# Altium PCB MOSFET.PcbDoc
Units mm, origin at the board's own origin, x right, y up, seen from the top; angles counter-clockwise.
Board outline 100 x 110 mm, 2 copper layers (Top Layer, Bottom Layer); 178 components, 63 nets, 636 pads, 0 vias.
Unrouted connection lines stored in the file: 541.
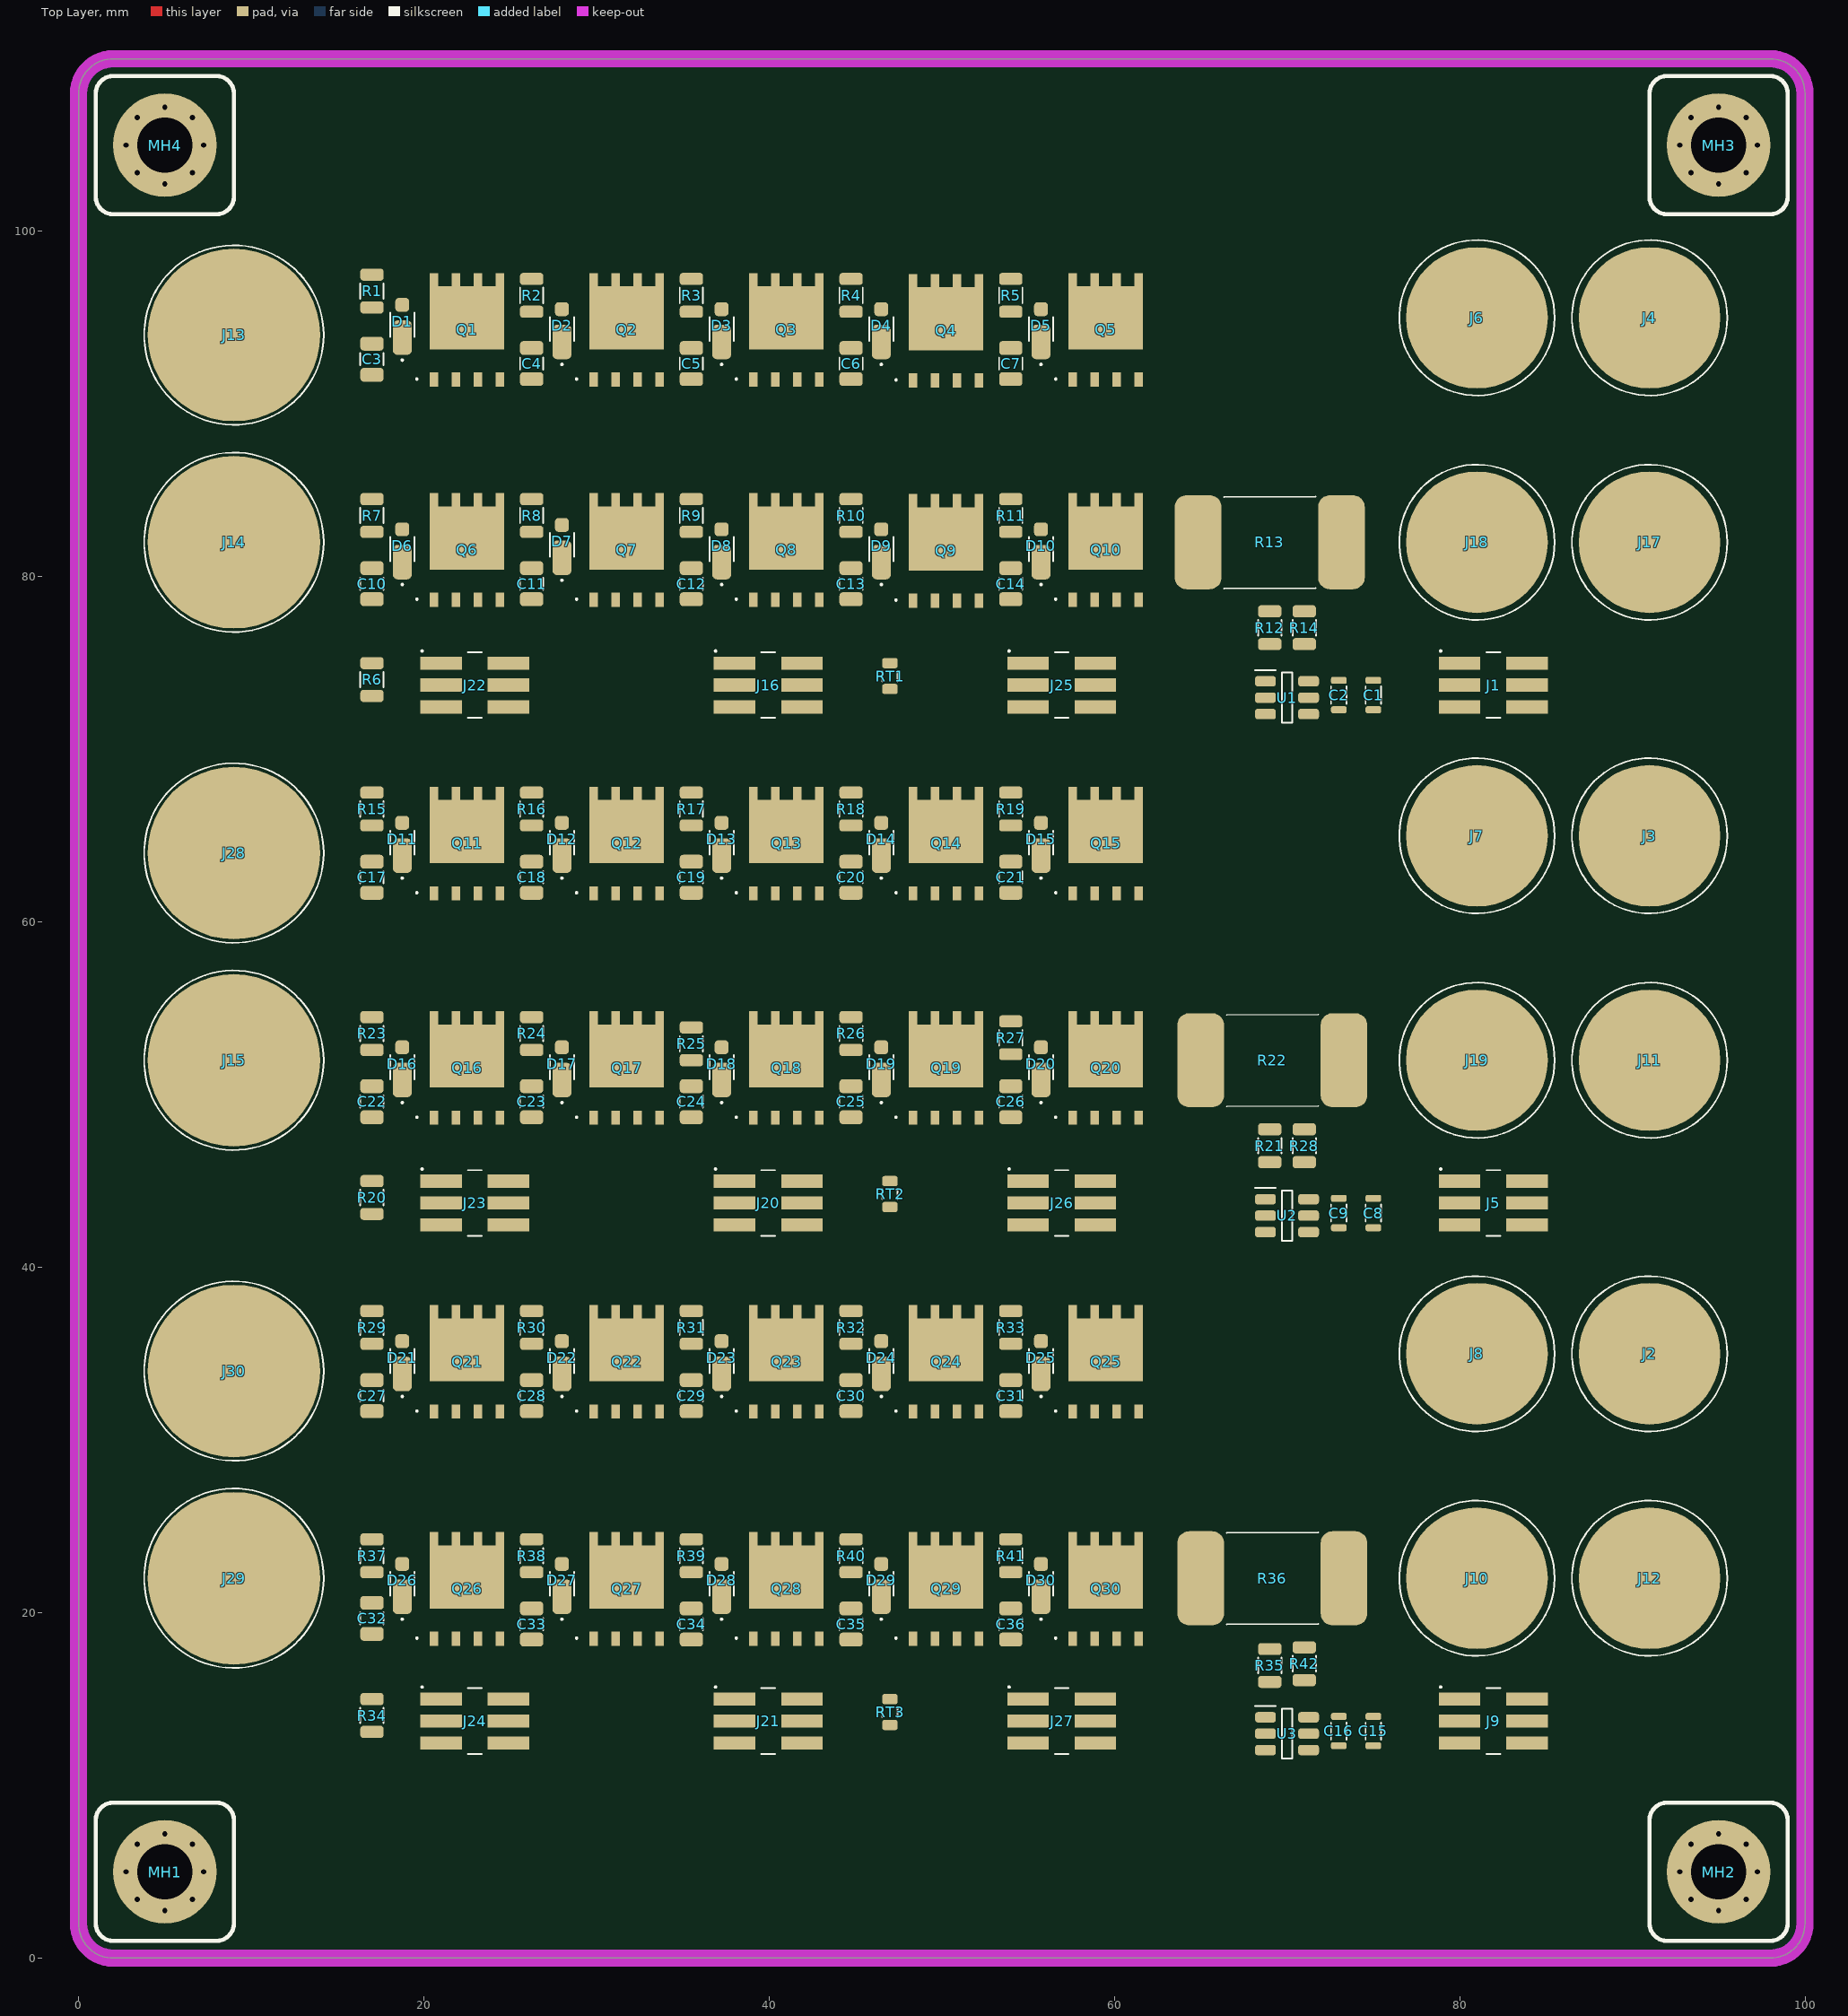
[diagram p0: Top Layer view]
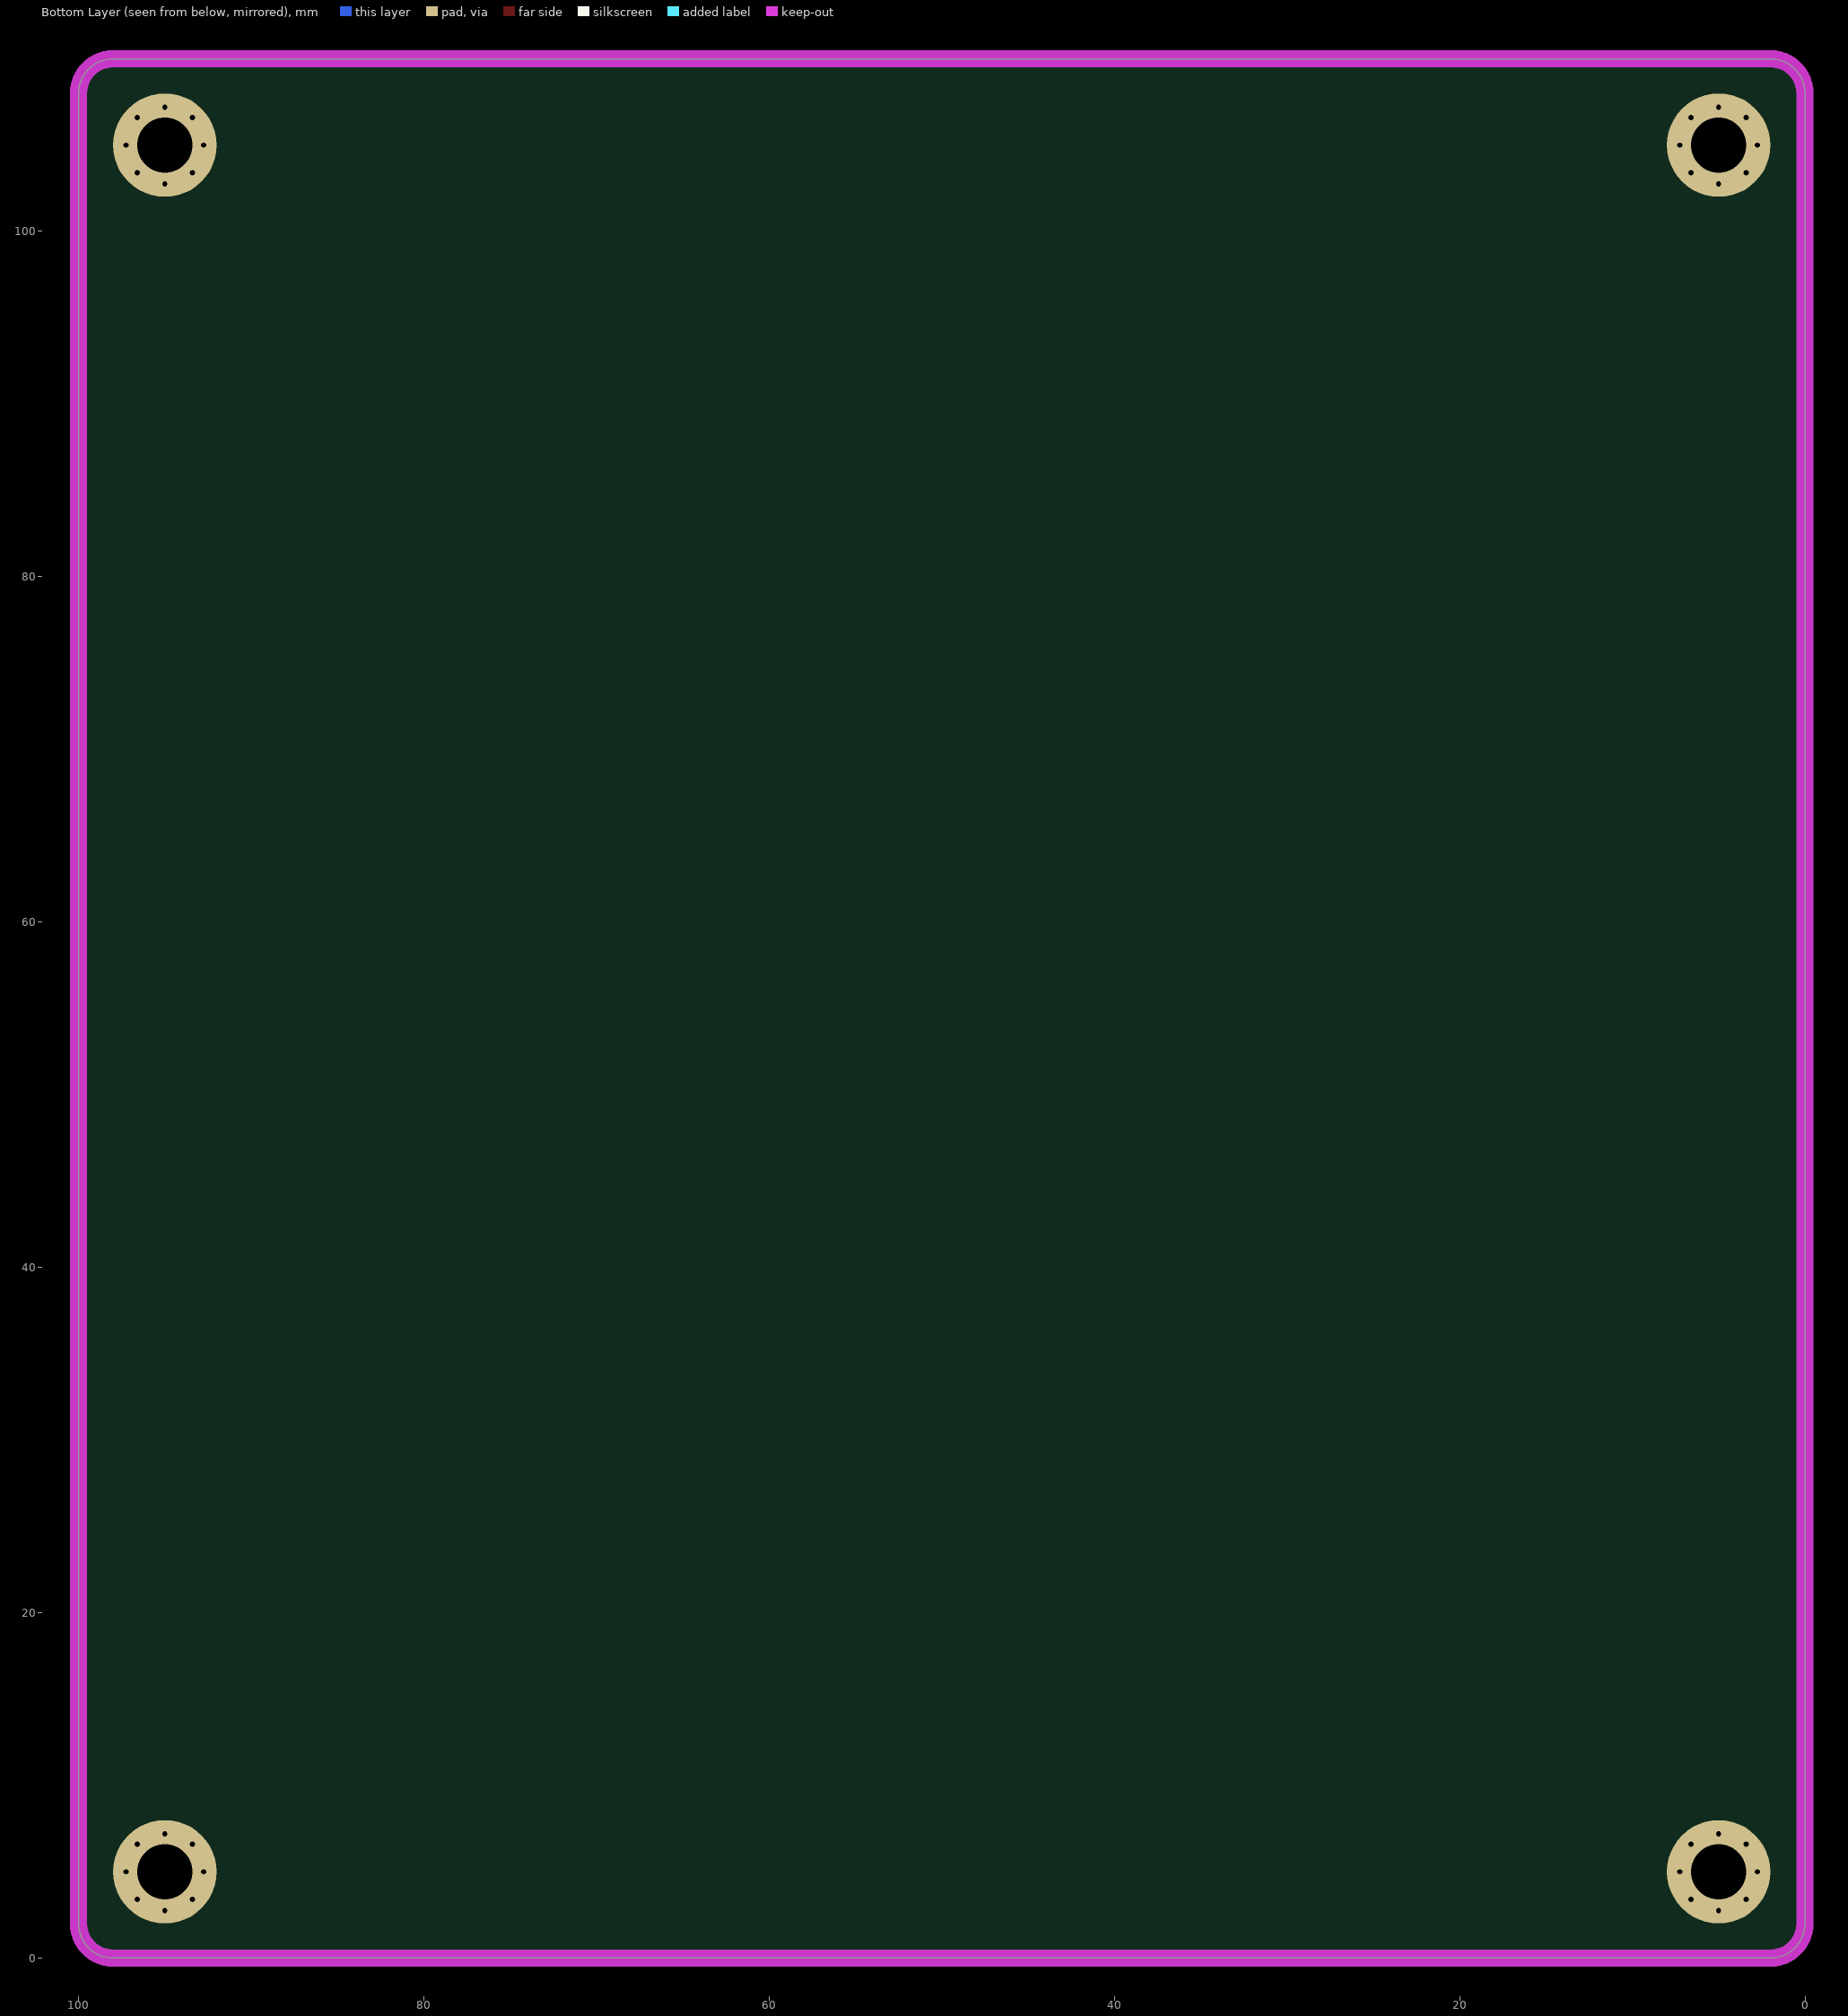
[diagram p1: Bottom Layer view, seen from below]

## Layer stack, top to bottom
Top Solder: solder mask 0.0102, Solder Resist, Dk 3.5
Top Layer: signal copper 0.0356
Dielectric 1: dielectric 0.32, FR-4, Dk 4.8
Bottom Layer: signal copper 0.0356
Bottom Solder: solder mask 0.0102, Solder Resist, Dk 3.5

## Board outline
0,2 0,108 cw(c2,108) 2,110 98,110 cw(c98,108) 100,108 100,2 cw(c98,2) 98,0 2,0 cw(c2,2)

## Design rules (kind name [scope] priority, off if disabled: settings)
Clearance [All] p1: gap=0.254 ignorepadtopadclearanceinfootprint=FALSE
DiffPairsRouting [All] p1: maxlimit=0.254 minlimit=0.254 mostfreqgap=0.254 toplayer_minwidth=0.381 toplayer_maxwidth=0.381 toplayer_prefwidth=0.381 bottomlayer_minwidth=0.381 bottomlayer_maxwidth=0.381 bottomlayer_prefwidth=0.381 maxuncoupledlength=12.7
PolygonConnect [All] p1: connectstyle=Relief reliefconductorwidth=0.254 reliefentries=4 polygonreliefangle="90 Angle" airgapwidth=0.254
RoutingVias [All] p1: holewidth=0.711 width=1.27 viastyle="Through Hole" minholewidth=0.711 minwidth=1.27 maxholewidth=0.711 maxwidth=1.27
SolderMaskExpansion [All] p1: expansion=0.102 istentingtop=FALSE
SupplyNets "Schematic Supply Nets_2" [InNet('+3V3')] p1: voltage=0.000
SupplyNets "Schematic Supply Nets_1" [InNet('GND')] p2: voltage=0.000
SupplyNets "Schematic Supply Nets" [InNet('VIN')] p3: voltage=0.000
Width [All] p1: maxlimit=0.254 minlimit=0.254 preferedwidth=0.254
29 further rules are at their usual default settings.

## Classes and differential pairs
differential pair SHUNT_C: +SHUNT_C_P -SHUNT_C_N
differential pair SHUNT_B: +SHUNT_B_P -SHUNT_B_N
differential pair SHUNT_A: +SHUNT_A_P -SHUNT_A_N

## Components (designator, comment, footprint, x,y, rotation, side; value= is the part's Value field where it differs from the comment)
C1 "0603" C_0603 75,74 r270 top value=1u
C2 "0603" C_0603 73,74 r270 top value=0.1u
C3 "0805" C_0805 17,93.5 r270 top value=Value
C4 "0805" C_0805 26.25,93.25 r270 top value=Value
C5 "0805" C_0805 35.5,93.25 r270 top value=Value
C6 "0805" C_0805 44.75,93.25 r270 top value=Value
C7 "0805" C_0805 54,93.25 r270 top value=Value
C8 "0603" C_0603 75,44 r270 top value=1u
C9 "0603" C_0603 73,44 r270 top value=0.1u
C10 "0805" C_0805 17,80.5 r270 top value=Value
C11 "0805" C_0805 26.25,80.5 r270 top value=Value
C12 "0805" C_0805 35.5,80.5 r270 top value=Value
C13 "0805" C_0805 44.75,80.5 r270 top value=Value
C14 "0805" C_0805 54,80.5 r270 top value=Value
C15 "0603" C_0603 75,14 r270 top value=1u
C16 "0603" C_0603 73,14 r270 top value=0.1u
C17 "0805" C_0805 17,63.5 r270 top value=Value
C18 "0805" C_0805 26.25,63.5 r270 top value=Value
C19 "0805" C_0805 35.5,63.5 r270 top value=Value
C20 "0805" C_0805 44.75,63.5 r270 top value=Value
C21 "0805" C_0805 54,63.5 r270 top value=Value
C22 "0805" C_0805 17,50.5 r270 top value=Value
C23 "0805" C_0805 26.25,50.5 r270 top value=Value
C24 "0805" C_0805 35.5,50.5 r270 top value=Value
C25 "0805" C_0805 44.75,48.7 r90 top value=Value
C26 "0805" C_0805 54,48.7 r90 top value=Value
C27 "0805" C_0805 17,33.477 r270 top value=Value
C28 "0805" C_0805 26.25,33.477 r270 top value=Value
C29 "0805" C_0805 35.5,33.477 r270 top value=Value
C30 "0805" C_0805 44.75,33.477 r270 top value=Value
C31 "0805" C_0805 54,33.477 r270 top value=Value
C32 "0805" C_0805 17,20.577 r270 top value=Value
C33 "0805" C_0805 26.25,20.25 r270 top value=Value
C34 "0805" C_0805 35.5,20.25 r270 top value=Value
C35 "0805" C_0805 44.75,20.25 r270 top value=Value
C36 "0805" C_0805 54,20.25 r270 top value=Value
D1 "V1PM15-M3_H" DO-219AD-2 18.75,93.85 r90 top
D2 "V1PM15-M3_H" DO-219AD-2 28,93.6 r90 top
D3 "V1PM15-M3_H" DO-219AD-2 37.25,93.6 r90 top
D4 "V1PM15-M3_H" DO-219AD-2 46.5,93.6 r90 top
D5 "V1PM15-M3_H" DO-219AD-2 55.75,93.6 r90 top
D6 "V1PM15-M3_H" DO-219AD-2 18.75,80.85 r90 top
D7 "V1PM15-M3_H" DO-219AD-2 28,81.1 r90 top
D8 "V1PM15-M3_H" DO-219AD-2 37.25,80.85 r90 top
D9 "V1PM15-M3_H" DO-219AD-2 46.5,80.85 r90 top
D10 "V1PM15-M3_H" DO-219AD-2 55.75,80.85 r90 top
D11 "V1PM15-M3_H" DO-219AD-2 18.75,63.85 r90 top
D12 "V1PM15-M3_H" DO-219AD-2 28,63.85 r90 top
D13 "V1PM15-M3_H" DO-219AD-2 37.25,63.85 r90 top
D14 "V1PM15-M3_H" DO-219AD-2 46.5,63.85 r90 top
D15 "V1PM15-M3_H" DO-219AD-2 55.75,63.85 r90 top
D16 "V1PM15-M3_H" DO-219AD-2 18.75,50.85 r90 top
D17 "V1PM15-M3_H" DO-219AD-2 28,50.85 r90 top
D18 "V1PM15-M3_H" DO-219AD-2 37.25,50.85 r90 top
D19 "V1PM15-M3_H" DO-219AD-2 46.5,50.85 r90 top
D20 "V1PM15-M3_H" DO-219AD-2 55.75,50.85 r90 top
D21 "V1PM15-M3_H" DO-219AD-2 18.75,33.827 r90 top
D22 "V1PM15-M3_H" DO-219AD-2 28,33.827 r90 top
D23 "V1PM15-M3_H" DO-219AD-2 37.25,33.827 r90 top
D24 "V1PM15-M3_H" DO-219AD-2 46.5,33.827 r90 top
D25 "V1PM15-M3_H" DO-219AD-2 55.75,33.827 r90 top
D26 "V1PM15-M3_H" DO-219AD-2 18.75,20.927 r90 top
D27 "V1PM15-M3_H" DO-219AD-2 28,20.927 r90 top
D28 "V1PM15-M3_H" DO-219AD-2 37.25,20.927 r90 top
D29 "V1PM15-M3_H" DO-219AD-2 46.5,20.927 r90 top
D30 "V1PM15-M3_H" DO-219AD-2 55.75,20.927 r90 top
J1 "HEADER" HEADER_MALE_2X3_1.27MM 80,75 r0 top
J2 "7466103" 7466203 91,35 r0 top
J3 "7466103" 7466203 91,65 r0 top
J4 "7466103" 7466203 91,95 r0 top
J5 "HEADER" HEADER_MALE_2X3_1.27MM 80,45 r0 top
J6 "7466103" 7466203 81,95 r0 top
J7 "7466103" 7466203 81,65 r0 top
J8 "7466103" 7466203 81,35 r0 top
J9 "HEADER" HEADER_MALE_2X3_1.27MM 80,15 r0 top
J10 "7466103" 7466203 81,22 r0 top
J11 "7466103" 7466203 91,52 r0 top
J12 "7466103" 7466203 91,22 r0 top
J13 "7466205R" 7466205R 9,94 r0 top
J14 "7466205R" 7466205R 9,82 r0 top
J15 "7466205R" 7466205R 9,52 r0 top
J16 "HEADER" HEADER_MALE_2X3_1.27MM 38,75 r0 top
J17 "7466103" 7466203 91,82 r0 top
J18 "7466103" 7466203 81,82 r0 top
J19 "7466103" 7466203 81,52 r0 top
J20 "HEADER" HEADER_MALE_2X3_1.27MM 38,45 r0 top
J21 "HEADER" HEADER_MALE_2X3_1.27MM 38,15 r0 top
J22 "HEADER" HEADER_MALE_2X3_1.27MM 21,75 r0 top
J23 "HEADER" HEADER_MALE_2X3_1.27MM 21,45 r0 top
J24 "HEADER" HEADER_MALE_2X3_1.27MM 21,15 r0 top
J25 "HEADER" HEADER_MALE_2X3_1.27MM 55,75 r0 top
J26 "HEADER" HEADER_MALE_2X3_1.27MM 55,45 r0 top
J27 "HEADER" HEADER_MALE_2X3_1.27MM 55,15 r0 top
J28 "7466205R" 7466205R 9,64 r0 top
J29 "7466205R" 7466205R 9,22 r0 top
J30 "7466205R" 7466205R 9,34 r0 top
MH1 "M3" MOUNTING_HOLE_M3 5,5 r0 top
MH2 "M3" MOUNTING_HOLE_M3 95,5 r0 top
MH3 "M3" MOUNTING_HOLE_M3 95,105 r0 top
MH4 "M3" MOUNTING_HOLE_M3 5,105 r0 top
Q1 "ISC073N12LM6ATMA1" TDSON-8 22.5,94.302 r0 top
Q2 "ISC073N12LM6ATMA1" TDSON-8 31.75,94.302 r0 top
Q3 "ISC073N12LM6ATMA1" TDSON-8 41,94.302 r0 top
Q4 "ISC073N12LM6ATMA1" TDSON-8 50.25,94.25 r0 top
Q5 "ISC073N12LM6ATMA1" TDSON-8 59.5,94.302 r0 top
Q6 "ISC073N12LM6ATMA1" TDSON-8 22.5,81.552 r0 top
Q7 "ISC073N12LM6ATMA1" TDSON-8 31.75,81.552 r0 top
Q8 "ISC073N12LM6ATMA1" TDSON-8 41,81.552 r0 top
Q9 "ISC073N12LM6ATMA1" TDSON-8 50.25,81.5 r0 top
Q10 "ISC073N12LM6ATMA1" TDSON-8 59.5,81.552 r0 top
Q11 "ISC073N12LM6ATMA1" TDSON-8 22.5,64.552 r0 top
Q12 "ISC073N12LM6ATMA1" TDSON-8 31.75,64.552 r0 top
Q13 "ISC073N12LM6ATMA1" TDSON-8 41,64.552 r0 top
Q14 "ISC073N12LM6ATMA1" TDSON-8 50.25,64.552 r0 top
Q15 "ISC073N12LM6ATMA1" TDSON-8 59.5,64.552 r0 top
Q16 "ISC073N12LM6ATMA1" TDSON-8 22.5,51.552 r0 top
Q17 "ISC073N12LM6ATMA1" TDSON-8 31.75,51.552 r0 top
Q18 "ISC073N12LM6ATMA1" TDSON-8 41,51.552 r0 top
Q19 "ISC073N12LM6ATMA1" TDSON-8 50.25,51.552 r0 top
Q20 "ISC073N12LM6ATMA1" TDSON-8 59.5,51.552 r0 top
Q21 "ISC073N12LM6ATMA1" TDSON-8 22.5,34.529 r0 top
Q22 "ISC073N12LM6ATMA1" TDSON-8 31.75,34.529 r0 top
Q23 "ISC073N12LM6ATMA1" TDSON-8 41,34.529 r0 top
Q24 "ISC073N12LM6ATMA1" TDSON-8 50.25,34.529 r0 top
Q25 "ISC073N12LM6ATMA1" TDSON-8 59.5,34.529 r0 top
Q26 "ISC073N12LM6ATMA1" TDSON-8 22.5,21.379 r0 top
Q27 "ISC073N12LM6ATMA1" TDSON-8 31.75,21.379 r0 top
Q28 "ISC073N12LM6ATMA1" TDSON-8 41,21.379 r0 top
Q29 "ISC073N12LM6ATMA1" TDSON-8 50.25,21.379 r0 top
Q30 "ISC073N12LM6ATMA1" TDSON-8 59.5,21.379 r0 top
R1 "0805" R_0805 17,97.5 r270 top value=Value
R2 "0805" R_0805 26.25,97.25 r270 top value=Value
R3 "0805" R_0805 35.5,97.25 r270 top value=Value
R4 "0805" R_0805 44.75,97.25 r270 top value=Value
R5 "0805" R_0805 54,97.25 r270 top value=Value
R6 "0805" R_0805 17,73.1 r90 top value=0R
R7 "0805" R_0805 17,84.5 r270 top value=Value
R8 "0805" R_0805 26.25,84.5 r270 top value=Value
R9 "0805" R_0805 35.5,84.5 r270 top value=Value
R10 "0805" R_0805 44.75,82.6 r90 top value=Value
R11 "0805" R_0805 54,84.5 r270 top value=Value
R12 "0805" R_0805 69,76.1 r90 top value=0R
R13 "WSLP3921L1000FEA" R_3921 69,82 r180 top value=100u
R14 "0805" R_0805 71,76.1 r90 top value=0R
R15 "0805" R_0805 17,67.5 r270 top value=Value
R16 "0805" R_0805 26.25,67.5 r270 top value=Value
R17 "0805" R_0805 35.5,67.5 r270 top value=Value
R18 "0805" R_0805 44.75,67.5 r270 top value=Value
R19 "0805" R_0805 54,67.5 r270 top value=Value
R20 "0805" R_0805 17,43.1 r90 top value=0R
R21 "0805" R_0805 69,46.1 r90 top value=0R
R22 "WSLP3921L1000FEA" R_3921 69.15,52 r180 top value=100u
R23 "0805" R_0805 17,54.5 r270 top value=Value
R24 "0805" R_0805 26.25,54.5 r270 top value=Value
R25 "0805" R_0805 35.5,53.9 r270 top value=Value
R26 "0805" R_0805 44.75,54.5 r270 top value=Value
R27 "0805" R_0805 54,54.25 r270 top value=Value
R28 "0805" R_0805 71,46.1 r90 top value=0R
R29 "0805" R_0805 17,37.477 r270 top value=Value
R30 "0805" R_0805 26.25,37.477 r270 top value=Value
R31 "0805" R_0805 35.5,37.477 r270 top value=Value
R32 "0805" R_0805 44.75,37.477 r270 top value=Value
R33 "0805" R_0805 54,37.477 r270 top value=Value
R34 "0805" R_0805 17,13.1 r90 top value=0R
R35 "0805" R_0805 69,16 r90 top value=0R
R36 "WSLP3921L1000FEA" R_3921 69.15,22 r180 top value=100u
R37 "0805" R_0805 17,24.25 r270 top value=Value
R38 "0805" R_0805 26.25,24.25 r270 top value=Value
R39 "0805" R_0805 35.5,24.25 r270 top value=Value
R40 "0805" R_0805 44.75,22.35 r90 top value=Value
R41 "0805" R_0805 54,24.25 r270 top value=Value
R42 "0805" R_0805 71,16.1 r90 top value=0R
RT1 "ERT-J1VG103JA" R_0603 47,75 r270 top value=10K
RT2 "ERT-J1VG103JA" R_0603 47,45 r270 top value=10K
RT3 "ERT-J1VG103JA" R_0603 47,15 r270 top value=10K
U1 "INA181A3IDBVR" SOT23-6 70,73 r0 top
U2 "INA181A3IDBVR" SOT23-6 70,43 r0 top
U3 "INA181A3IDBVR" SOT23-6 70,13 r0 top

## Footprints (in the part's own frame and the unit in brackets; to place one, negate y for a bottom-side part, rotate by r counter-clockwise, add the part's x,y. Pads: shape width x height; smd on the part's side, far side on the other; paste and mask are expansions set on the pad)
7466203 [mm]
  round 8.2 smd: 1(0,0)
  silkscreen extent -4.5,-4.5 4.5,4.5, body extent -3.49,-3.5 3.49,3.5, height 7
7466205R [mm]
  round 10 smd: 1(0,0)
  silkscreen extent -5.2,-5.2 5.2,5.2, body extent -4.5,-4.5 4.5,4.49, height 7
C_0603 [mm]
  rrect50% 0.4x0.9 smd: 1(0,0) 2(1.7,0)
  silkscreen extent 0.35,-0.45 1.35,0.45, body extent 0.05,-0.4 1.65,0.4, height 0.9
C_0805 [mm]
  rrect50% 0.8x1.35 smd: 1(0,0) 2(1.8,0)
  silkscreen extent 0.55,-0.67 1.25,0.67, body extent -0.1,-0.63 1.9,0.63, height 1.4
DO-219AD-2 [mm]
  rrect50% 2x1.1 smd: 1(0,0)
  rrect50% 0.8x0.8 smd: 2(1.9,0)
  silkscreen extent -1.35,-0.7 1.45,0.7, body extent -0.6,-0.65 1.9,0.65, height 0.68
HEADER_MALE_2X3_1.27MM [mm]
  rect 2.4x0.76 smd: 1(0,0) 2(3.9,0) 3(0,-1.27) 4(3.9,-1.27) 5(0,-2.54) 6(3.9,-2.54)
  silkscreen extent -1.15,-3.17 2.35,0.75, body extent -0.8,-3.17 4.7,0.64, height 4.5
MOUNTING_HOLE_M3 [mm]
  round 0.6 hole 0.3: 1(-2.25,0) 1(-1.6,-1.6) 1(-1.6,1.6) 1(0,-2.25) 1(0,2.2) 1(1.6,-1.6) 1(1.6,1.6) 1(2.25,0)
  round 6 hole 3.2: 1(0,0)
  silkscreen extent -4,-4 4,4
R_0603 [mm]
  rrect50% 0.6x0.9 smd: 1(0,0) 2(1.5,0)
  silkscreen extent 0.45,-0.45 1.05,0.45, body extent -0.05,-0.4 1.55,0.4, height 0.55
R_0805 [mm]
  rrect50% 0.7x1.35 smd: 1(0,0) 2(1.9,0)
  silkscreen extent 0.5,-0.67 1.4,0.67, body extent -0.07,-0.63 1.97,0.63, height 0.6
R_3921 [mm]
  rrect50% 2.7x5.45 smd: 1(-4.15,0) 2(4.15,0)
  silkscreen extent -2.65,-2.65 2.65,2.67, body extent -5,-2.6 5,2.6, height 1.19
SOT23-6 [mm]
  rrect50% 1.2x0.6 smd: 1(-1.25,0.95) 2(-1.25,0) 3(-1.25,-0.95) 4(1.25,-0.95) 5(1.25,0) 6(1.25,0.95)
  silkscreen extent -1.85,-1.45 0.3,1.6, body extent -1.4,-1.45 1.4,1.45, height 1.2
TDSON-8 [mm]
  rect 0.5x0.815 smd: 1(-1.905,-2.88) 2(-0.635,-2.88) 3(0.635,-2.88) 4(1.905,-2.88)
  rect 0.5x0.765 smd: 5(1.905,2.908) 6(0.635,2.908) 7(-0.635,2.908) 8(-1.905,2.908)
  rect 4.31x3.655 smd: 9(0,0.698)
  silkscreen extent -2.95,-2.9 -2.85,-2.8, body extent -2.58,-3.24 2.58,3.24, height 1.3

## Part data
C1 C2 C8 C9 C15 C16: library part CAP_0603, "SMD Chip Capacitor - 0603", Voltage=25V, ComponentLink1Description=Link
C3 C4 C5 C6 C7 C10 C11 C12 C13 C14 C17 C18 C19 C20 C21 C22 C23 C24 C25 C26 C27 C28 C29 C30 C31 C32 C33 C34 C35 C36: library part CAP_0805, "SMD Chip Capacitor - 0805", Voltage=100V, ComponentLink1Description=Link
D1 D2 D3 D4 D5 D6 D7 D8 D9 D10 D11 D12 D13 D14 D15 D16 D17 D18 D19 D20 D21 D22 D23 D24 D25 D26 D27 D28 D29 D30: library part DIODE_SCHOTTKY_V1PM15-M3_H, "Schottky Diode, 150V, 1A, Vf: 1.13V", ComponentLink1Description="New link", ComponentLink1URL=https://www.mouser.com.tr/ProductDetail/Vishay-General-Semiconductor/V1PM15-M3-H?qs=%252BdQmOuGyFcHNPmRG94B76g%3D%3D, Vf=1.3V, Vrm=150V, If=1A
J1 J5 J9 J16 J20 J21 J22 J23 J24 J25 J26 J27: library part HEADER_SMD_2X3_1.27MM
J2 J3 J4 J6 J7 J8 J10 J11 J12 J17 J18 J19: library part TERMINAL_7466203, "Terminals, SMT, M3 Thread, 50A", Current=50A, ComponentLink1Description="New link", ComponentLink1URL=https://www.mouser.com.tr/ProductDetail/Wurth-Elektronik/7466203?qs=IfoubJuuTRb774UUJ30heA%3D%3D
J13 J14 J15 J28 J29 J30: library part TERMINAL_7466205R, "Terminals, SMT, M5 Thread, 70A", Current=70A, ComponentLink1Description="New link", ComponentLink1URL=https://www.mouser.com.tr/ProductDetail/Wurth-Elektronik/7466205R?qs=lBTPRtX1sU8D2oI%252B7M8jdw%3D%3D
MH1 MH2 MH3 MH4: library part Mounting_Hole_M3, "M3 Mounting Hole"
Q1 Q2 Q3 Q4 Q5 Q6 Q7 Q8 Q9 Q10 Q11 Q12 Q13 Q14 Q15 Q16 Q17 Q18 Q19 Q20 Q21 Q22 Q23 Q24 Q25 Q26 Q27 Q28 Q29 Q30: library part MOSFET_N_ISC073N12LM6ATMA1, "N Channel MOSFET, 120V, 86A, 7.3mR", ComponentLink1Description="New link", ComponentLink1URL=https://www.mouser.com.tr/ProductDetail/Infineon-Technologies/ISC073N12LM6ATMA1?qs=amGC7iS6iy8CGAbD5A4F5Q%3D%3D, Qgate=14.4nC, Rds(on)=7.3mR, Vds=120V, Ids=86A
R1 R2 R3 R4 R5 R6 R7 R8 R9 R10 R11 R12 R14 R15 R16 R17 R18 R19 R20 R21 R23 R24 R25 R26 R27 R28 R29 R30 R31 R32 R33 R34 R35 R37 R38 R39 R40 R41 R42: library part RES_0805, "SMD Chip Resistor - 0805", Tolerance=?, ComponentLink1Description=Link
R13 R22 R36: library part RES_SHUNT_100uR_9W, "Shunt Resistor, 100uR, 9W", Tolerance=%1, ComponentLink1Description="New link", ComponentLink1URL=https://www.mouser.com.tr/ProductDetail/Vishay-Dale/WSLP3921L1000FEA?qs=TiOZkKH1s2S5b3T%252BuIp%2FVQ%3D%3D, Watt=9W
RT1 RT2 RT3: library part NTC_0603, "NTC Thermistors 0603 Package", Tolerance=%5, ComponentLink1Description="New link", ComponentLink1URL=https://www.mouser.com.tr/ProductDetail/Panasonic/ERT-J1VG103JA?qs=sGAEpiMZZMt1hubY80%2Fs8H%252BVnVr2XwzTQ3Tjm%2FhCYDQ%3D, Watt=0.1W
U1 U2 U3: library part IC_INA181A3IDBVR, "Current Sense Amplifiers, Vos: 100uV, Gain: 100V/V", ComponentLink1Description="New link", ComponentLink1URL=https://www.mouser.com.tr/ProductDetail/Texas-Instruments/INA181A3IDBVR?qs=5aG0NVq1C4xG8aOdRB7o5A%3D%3D

## Nets (pads, with @x,y where several pads share a name; then routed paths per layer and width w, separated by ;. In a path a pad name is that pad's centre, name@x,y a point inside that pad or via, vN(x,y) a via of type N, cw(c..) or ccw(c..) an arc to the next point about the centre after c; other vN are vias at no path point)
+3V3: C1.1 C2.1 C8.1 C9.1 C15.1 C16.1 J1.1 J5.1 J9.1 U1.6 U2.6 U3.6
GHA: J25.1 Q1.4 Q2.4 Q3.4 Q4.4 Q5.4
GHB: J26.1 Q11.4 Q12.4 Q13.4 Q14.4 Q15.4
GHC: J27.1 Q21.4 Q22.4 Q23.4 Q24.4 Q25.4
GLA: J25.3 Q6.4 Q7.4 Q8.4 Q9.4 Q10.4
GLB: J26.3 Q16.4 Q17.4 Q18.4 Q19.4 Q20.4
GLC: J27.3 Q26.4 Q27.4 Q28.4 Q29.4 Q30.4
GND: C1.2 C2.2 C8.2 C9.2 C15.2 C16.2 J1.3 J1.5 J5.3 J5.5 J9.3 J9.5 J10.1 J11.1 J12.1 J16.2 J16.4 J16.5 J16.6 J17.1 J18.1 J19.1 J20.2 J20.4 J20.5 J20.6 J21.2 J21.4 J21.5 J21.6 J22.2 J22.4 J22.6 J23.2 J23.4 J23.6 J24.2 J24.4 J24.6 J25.2 J25.4 J25.5 J25.6 J26.2 J26.4 J26.5 J26.6 J27.2 J27.4 J27.5 J27.6 MH1.1 MH2.1 MH3.1 MH4.1 R13.1 R14.2 R22.1 R28.2 R36.1 R42.2 U1.2 U1.5 U2.2 U2.5 U3.2 U3.5
I_PHASE_A: J1.2 J1.4 J1.6 U1.1
I_PHASE_B: J5.2 J5.4 J5.6 U2.1
I_PHASE_C: J9.2 J9.4 J9.6 U3.1
NetC3_1: C3.1 D1.1 R1.2
NetC4_1: C4.1 D2.1 R2.2
NetC5_1: C5.1 D3.1 R3.2
NetC6_1: C6.1 D4.1 R4.2
NetC7_1: C7.1 D5.1 R5.2
NetC10_1: C10.1 D6.1 R7.2
NetC10_2: C10.2 C11.2 C12.2 C13.2 C14.2 Q6.1 Q6.2 Q6.3 Q7.1 Q7.2 Q7.3 Q8.1 Q8.2 Q8.3 Q9.1 Q9.2 Q9.3 Q10.1 Q10.2 Q10.3 R12.2 R13.2
NetC11_1: C11.1 D7.1 R8.2
NetC12_1: C12.1 D8.1 R9.2
NetC13_1: C13.1 D9.1 R10.2
NetC14_1: C14.1 D10.1 R11.2
NetC17_1: C17.1 D11.1 R15.2
NetC18_1: C18.1 D12.1 R16.2
NetC19_1: C19.1 D13.1 R17.2
NetC20_1: C20.1 D14.1 R18.2
NetC21_1: C21.1 D15.1 R19.2
NetC22_1: C22.1 D16.1 R23.2
NetC22_2: C22.2 C23.2 C24.2 C25.2 C26.2 Q16.1 Q16.2 Q16.3 Q17.1 Q17.2 Q17.3 Q18.1 Q18.2 Q18.3 Q19.1 Q19.2 Q19.3 Q20.1 Q20.2 Q20.3 R21.2 R22.2
NetC23_1: C23.1 D17.1 R24.2
NetC24_1: C24.1 D18.1 R25.2
NetC25_1: C25.1 D19.1 R26.2
NetC26_1: C26.1 D20.1 R27.2
NetC27_1: C27.1 D21.1 R29.2
NetC28_1: C28.1 D22.1 R30.2
NetC29_1: C29.1 D23.1 R31.2
NetC30_1: C30.1 D24.1 R32.2
NetC31_1: C31.1 D25.1 R33.2
NetC32_1: C32.1 D26.1 R37.2
NetC32_2: C32.2 C33.2 C34.2 C35.2 C36.2 Q26.1 Q26.2 Q26.3 Q27.1 Q27.2 Q27.3 Q28.1 Q28.2 Q28.3 Q29.1 Q29.2 Q29.3 Q30.1 Q30.2 Q30.3 R35.2 R36.2
NetC33_1: C33.1 D27.1 R38.2
NetC34_1: C34.1 D28.1 R39.2
NetC35_1: C35.1 D29.1 R40.2
NetC36_1: C36.1 D30.1 R41.2
NTC1+: J16.1 RT1.1
NTC1-: J16.3 RT1.2
NTC2+: J20.1 RT2.1
NTC2-: J20.3 RT2.2
NTC3+: J21.1 RT3.1
NTC3-: J21.3 RT3.2
PHASE_A: C3.2 C4.2 C5.2 C6.2 C7.2 D6.2 D7.2 D8.2 D9.2 D10.2 J13.1 J14.1 Q1.1 Q1.2 Q1.3 Q2.1 Q2.2 Q2.3 Q3.1 Q3.2 Q3.3 Q4.1 Q4.2 Q4.3 Q5.1 Q5.2 Q5.3 Q6.5 Q6.6 Q6.7 Q6.8 Q6.9 Q7.5 Q7.6 Q7.7 Q7.8 Q7.9 Q8.5 Q8.6 Q8.7 Q8.8 Q8.9 Q9.5 Q9.6 Q9.7 Q9.8 Q9.9 Q10.5 Q10.6 Q10.7 Q10.8 Q10.9 R6.2 R7.1 R8.1 R9.1 R10.1 R11.1
PHASE_B: C17.2 C18.2 C19.2 C20.2 C21.2 D16.2 D17.2 D18.2 D19.2 D20.2 J15.1 J28.1 Q11.1 Q11.2 Q11.3 Q12.1 Q12.2 Q12.3 Q13.1 Q13.2 Q13.3 Q14.1 Q14.2 Q14.3 Q15.1 Q15.2 Q15.3 Q16.5 Q16.6 Q16.7 Q16.8 Q16.9 Q17.5 Q17.6 Q17.7 Q17.8 Q17.9 Q18.5 Q18.6 Q18.7 Q18.8 Q18.9 Q19.5 Q19.6 Q19.7 Q19.8 Q19.9 Q20.5 Q20.6 Q20.7 Q20.8 Q20.9 R20.2 R23.1 R24.1 R25.1 R26.1 R27.1
PHASE_C: C27.2 C28.2 C29.2 C30.2 C31.2 D26.2 D27.2 D28.2 D29.2 D30.2 J29.1 J30.1 Q21.1 Q21.2 Q21.3 Q22.1 Q22.2 Q22.3 Q23.1 Q23.2 Q23.3 Q24.1 Q24.2 Q24.3 Q25.1 Q25.2 Q25.3 Q26.5 Q26.6 Q26.7 Q26.8 Q26.9 Q27.5 Q27.6 Q27.7 Q27.8 Q27.9 Q28.5 Q28.6 Q28.7 Q28.8 Q28.9 Q29.5 Q29.6 Q29.7 Q29.8 Q29.9 Q30.5 Q30.6 Q30.7 Q30.8 Q30.9 R34.2 R37.1 R38.1 R39.1 R40.1 R41.1
SHUNT_A_N: R14.1 U1.4
SHUNT_A_P: R12.1 U1.3
SHUNT_B_N: R28.1 U2.4
SHUNT_B_P: R21.1 U2.3
SHUNT_C_N: R42.1 U3.4
SHUNT_C_P: R35.1 U3.3
VIN: D1.2 D2.2 D3.2 D4.2 D5.2 D11.2 D12.2 D13.2 D14.2 D15.2 D21.2 D22.2 D23.2 D24.2 D25.2 J2.1 J3.1 J4.1 J6.1 J7.1 J8.1 Q1.5 Q1.6 Q1.7 Q1.8 Q1.9 Q2.5 Q2.6 Q2.7 Q2.8 Q2.9 Q3.5 Q3.6 Q3.7 Q3.8 Q3.9 Q4.5 Q4.6 Q4.7 Q4.8 Q4.9 Q5.5 Q5.6 Q5.7 Q5.8 Q5.9 Q11.5 Q11.6 Q11.7 Q11.8 Q11.9 Q12.5 Q12.6 Q12.7 Q12.8 Q12.9 Q13.5 Q13.6 Q13.7 Q13.8 Q13.9 Q14.5 Q14.6 Q14.7 Q14.8 Q14.9 Q15.5 Q15.6 Q15.7 Q15.8 Q15.9 Q21.5 Q21.6 Q21.7 Q21.8 Q21.9 Q22.5 Q22.6 Q22.7 Q22.8 Q22.9 Q23.5 Q23.6 Q23.7 Q23.8 Q23.9 Q24.5 Q24.6 Q24.7 Q24.8 Q24.9 Q25.5 Q25.6 Q25.7 Q25.8 Q25.9 R1.1 R2.1 R3.1 R4.1 R5.1 R15.1 R16.1 R17.1 R18.1 R19.1 R29.1 R30.1 R31.1 R32.1 R33.1
VS_A: J22.1 J22.3 J22.5 R6.1
VS_B: J23.1 J23.3 J23.5 R20.1
VS_C: J24.1 J24.3 J24.5 R34.1

## Keep-outs
Keep-Out Layer:
  the board outline again, w1